# Altium PCB tablo tara2.PcbDoc
Units mm, origin at the board's own origin, x right, y up, seen from the top; angles counter-clockwise.
Board outline 151 x 86.38 mm, 2 copper layers (Top Layer, Bottom Layer); 22 components, 10 nets, 58 pads, 0 vias.
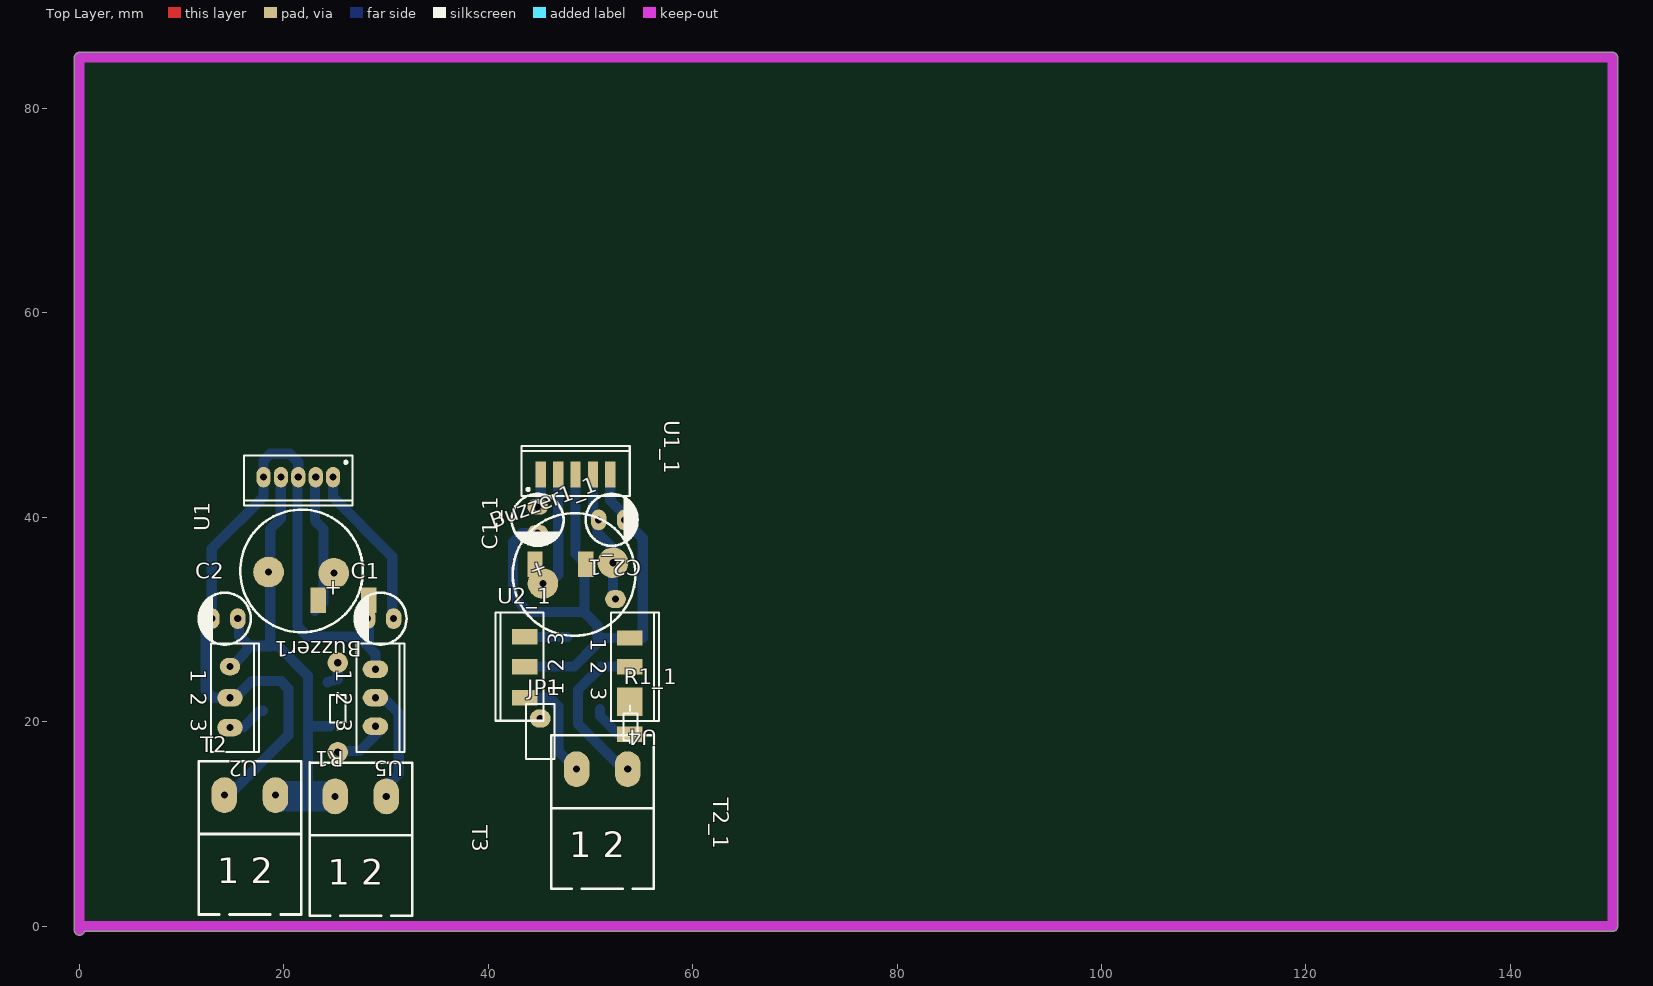
[diagram p0: Top Layer view]
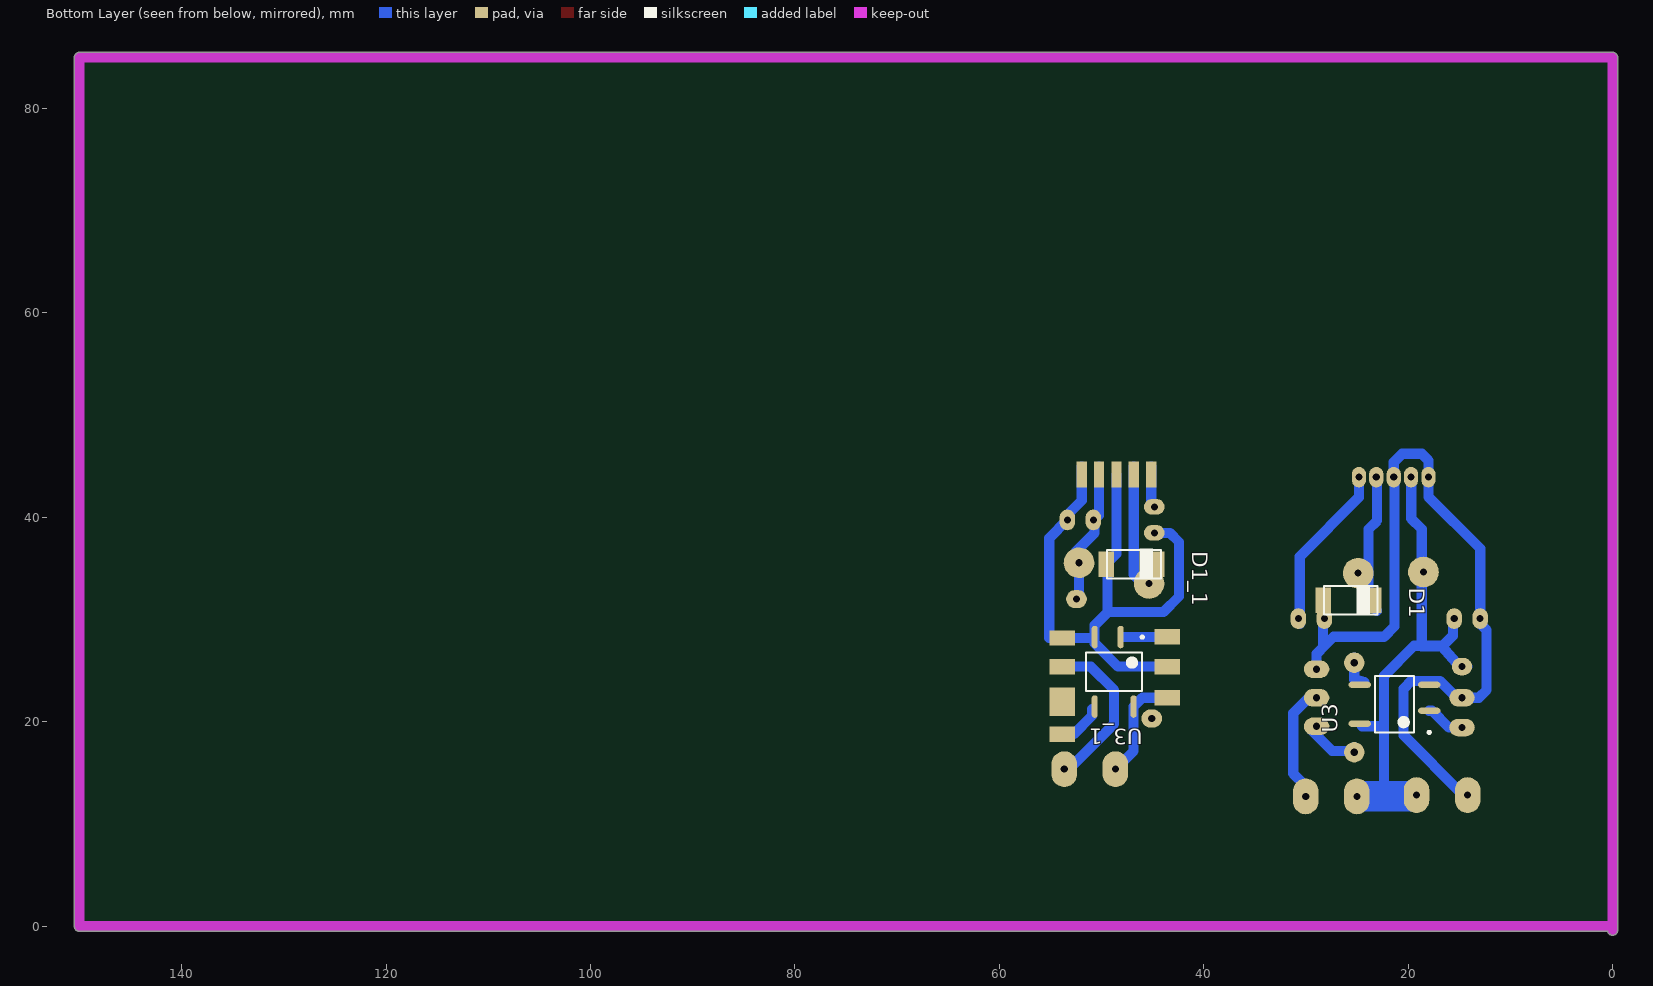
[diagram p1: Bottom Layer view, seen from below]

## Layer stack, top to bottom
Top Solder: solder mask 0.0102, Solder Resist, Dk 3.5
Top Layer: signal copper 0.0356
Dielectric 1: dielectric 0.32, FR-4, Dk 4.8
Bottom Layer: signal copper 0.0356
Bottom Solder: solder mask 0.0102, Solder Resist, Dk 3.5

## Board outline
-0.5,-0.381 -0.5,85 cw(c0,85) 0,85.5 150,85.5 cw(c150,85) 150.5,85 150.5,0 cw(c150,0) 150,-0.5 0.486,-0.5 cw(c0,-0.381)

## Design rules (kind name [scope] priority, off if disabled: settings)
Clearance Clearance_1 [InPolygon] p1: gap=0.8 ignorepadtopadclearanceinfootprint=FALSE
Clearance [All] p2: gap=0.254 ignorepadtopadclearanceinfootprint=FALSE except(0: Arc-Hole Track-Hole SMDPad-Hole THPad-Hole Via-Hole Fill-Hole Poly-Hole Region-Hole Text-Hole)
PolygonConnect [All] p1: connectstyle=Relief reliefconductorwidth=0.254 reliefentries=4 polygonreliefangle="90 Angle" airgapwidth=0.254
RoomDefinition "tablo tara2" [InComponentClass('tablo tara2')] p1: confinementstyle=ConfineIn formatcopy=TRUE lockcomponents=FALSE outline 144.907,-4.953 247.904,-4.953 247.904,23.114 144.907,23.114
RoutingLayers [All] p1: top layer_v5=FALSE bottom layer_v5=TRUE
RoutingVias [All] p1: holewidth=0.711 width=2.5 viastyle="Through Hole" minholewidth=0.711 minwidth=1.27 maxholewidth=0.711 maxwidth=2
SolderMaskExpansion [All] p1: expansion=0.102
Width [All] p1: maxlimit=3 minlimit=0.5 preferedwidth=1
29 further rules are at their usual default settings.

## Components (designator, comment, footprint, x,y, rotation, side; value= is the part's Value field where it differs from the comment)
Buzzer1 "Buzzer" BUZZER#1 21.732,34.758 r180 top
Buzzer1_1 "Buzzer" BUZZER#2 48.387,34.417 r20 top (schematic designator Buzzer1)
C1 "Value" ELEC-CAP-RAD10-20 29.464,30.099 r0 top
C1_1 "Value" ELEC-CAP-RAD10-20 44.831,39.751 r90 top (schematic designator C1)
C2 "Value" ELEC-CAP-RAD10-20 14.224,30.099 r0 top
C2_1 "Value" ELEC-CAP-RAD10-20 52.07,39.751 r180 top (schematic designator C2)
D1 "MODEL" DO-41 29.337,31.877 r180 bottom
D1_1 "MODEL" DO-41 50.546,35.433 r180 bottom (schematic designator D1)
JP1 "Jumper" "Header 2X1" 45.085,19.05 r90 top
R1 "Res2" Res50#1 25.273,20.066 r270 top
R1_1 "Res2" Res50#2 53.848,20.701 r90 top (schematic designator R1)
T2 "Phoenix terminal" "phoenix terminal 2" 11.684,1.143 r0 top
T2_1 "Phoenix terminal" "phoenix terminal 2" 46.148,3.683 r0 top (schematic designator T2)
T3 "Phoenix terminal" "phoenix terminal 2" 22.526,1.016 r0 top
U1 "LM2576T-3.3" T05A#1 21.414,43.942 r180 top
U1_1 "LM2576T-3.3" T05A#2 48.543,44.196 r0 top (schematic designator U1)
U2 "L4931CV30" TO-220A#1 14.732,22.352 r270 top
U2_1 "L4931CV30" TO-220A#2 43.561,25.4 r90 top (schematic designator U2)
U3 "ATtiny15L-1SC" 8S2_N 21.336,21.717 r0 bottom
U3_1 "ATtiny15L-1SC" 8S2_N 48.768,24.892 r270 bottom (schematic designator U3)
U4 "L4931CV30" TO-220A#3 53.848,25.4 r270 top
U5 "L4931CV30" TO-220A#4 28.956,22.352 r270 top

## Footprints (in the part's own frame and the unit in brackets; to place one, negate y for a bottom-side part, rotate by r counter-clockwise, add the part's x,y. Pads: shape width x height; smd on the part's side, far side on the other; paste and mask are expansions set on the pad)
8S2_N [mm] "SOP, 8-Leads, Body 5.3x5.3mm, Pitch 1.27mm, IPC Medium Density"
  oval 2.2x0.6 smd: 2(-3.4,0.635) 4(-3.4,-1.905) 5(3.4,-1.905) 8(3.4,1.905)
  silkscreen extent -3.52,-2.75 1.9,2.88, body extent -2.73,-2.75 2.73,2.75, height 2.16
BUZZER#1 [mm] "BUZZER"
  round 3 hole 0.7: 1(-3.16,0.214) 2(3.231,0.105)
  silkscreen extent -6,-6 6,6
BUZZER#2 [mm] "BUZZER"
  round 3 hole 0.7: 1(-3.16,0.214) 2(3.971,-0.229)
  silkscreen extent -6,-6 6,6
DO-41 [mm]
  rect 1.5x2.5 all layers, no hole: 1(1.016,0) 2(5.969,0)
  silkscreen extent 1.1,-1.5 6.35,1.5, body extent -0.41,-1.33 8,1.33, height 3.33
ELEC-CAP-RAD10-20 [mil]
  oval 60x80 hole 27.56: 1(-50,0) 2(50,0)
  silkscreen extent -100,-100 100,100, body extent -124,-124 124,124, height 404
"Header 2X1" [mil]
  oval 70x80 hole 27.56: 1(510,-290) 2(50,0)
  silkscreen extent -105,-55 105,55, body extent -100,-50 100,50, height 374
"phoenix terminal 2" [mm] "2 terminals"
  oval 2.5x3.5 hole 0.7: 1(2.493,11.684) 2(7.493,11.684)
  silkscreen extent 0,0 10.03,15
Res50#1 [mm] "50mm Pin Spacing"
  round 2 hole 0.7: 1(-5.715,0) 2(3.048,0)
  silkscreen extent -2.77,-0.76 0.89,0.76
Res50#2 [mm] "50mm Pin Spacing"
  rect 1.5x2.5 all layers, no hole: 1(-1.905,0) 2(0.635,0)
  silkscreen extent -2.77,-0.76 0.89,0.64
T05A#1 [mm] "TO, Thru-Hole, Vertical, Heatsink Mounted; 5 In-Line Leads; Pitch 1.70 mm"
  oval 1.4x2 hole 0.7: 1(-3.4,0) 2(-1.7,0) 3(0,0) 4(1.7,0) 5(3.4,0)
  silkscreen extent -5.3,-2.1 5.3,2.8, body extent -5.35,-2.15 5.35,2.85, height 19.6
T05A#2 [mm] "TO, Thru-Hole, Vertical, Heatsink Mounted; 5 In-Line Leads; Pitch 1.70 mm"
  rect 1x2.5 all layers, no hole: 1(-3.4,0) 2(-1.7,0) 3(0,0) 4(1.7,0) 5(3.4,0)
  silkscreen extent -5.3,-2.1 5.3,2.8, body extent -5.35,-2.15 5.35,2.85, height 19.6
TO-220A#1 [mm] "TO, Thru-Hole, Vertical, Heatsink Mounted; 3 In-Line Leads; Pitch 2.54 mm"
  oval 1.7x2 hole 0.7: 1(-3.048,0)
  oval 1.7x2.5 hole 0.7: 2(0,0) 3(2.921,0)
  silkscreen extent -5.3,-1.85 5.3,2.85
TO-220A#2 [mm] "TO, Thru-Hole, Vertical, Heatsink Mounted; 3 In-Line Leads; Pitch 2.54 mm"
  rect 1.5x2.5 all layers, no hole: 1(-3.048,0) 2(0,0) 3(2.921,0)
  silkscreen extent -5.3,-1.85 5.3,2.85
TO-220A#3 [mm] "TO, Thru-Hole, Vertical, Heatsink Mounted; 3 In-Line Leads; Pitch 2.54 mm"
  rect 1.5x2.5 all layers, no hole: 1(-2.794,0) 2(0,0) 3(2.794,0)
  silkscreen extent -5.3,-1.85 5.3,2.85
TO-220A#4 [mm] "TO, Thru-Hole, Vertical, Heatsink Mounted; 3 In-Line Leads; Pitch 2.54 mm"
  oval 1.7x2.5 hole 0.7: 1(-2.794,0) 2(0,0) 3(2.794,0)
  silkscreen extent -5.3,-1.85 5.3,2.85

## Part data
C1 C1_1 C2 C2_1: library part "Capacitor Electrolytic", "Electrolytic Capacitor"
D1 D1_1: library part Diode, "Diode", MODEL=1N4148
R1 R1_1: "Resistor", LatestRevisionDate=17-Jul-2002, LatestRevisionNote="Re-released for DXP Platform.", PackageDescription="Axial Device, Thru-Hole; 2 Leads; 0.4 in Pin Spacing", PackageReference=AXIAL-0.4, Published=8-Jun-2000, Publisher="Altium Limited"
T2 T2_1 T3: library part "Phoenix terminal 2", "Terminal 2 Pin", ComponentLinkURL=www.picpars.com, Designer="Seyed Mohsen Ghasemain", E-mail=picpars@gmail.com
U1 U1_1: "SIMPLE SWITCHER; 3A Step-Down Voltage Regulator", DigiKeyPartNumber=LM2576T-3.3NS-ND, Manufacturer="National Semiconductor", PackageTopMarking="NSUZXYTT*LM2576T*-3.3 P+", PowerWise=N, Code_JEDEC=TO-220-AB, ComponentLink1Description="LM2576 Datasheet", ComponentLink1URL=http://www.national.com/ds/LM/LM2576.pdf, ComponentLink2Description="LM2576 Web Page", ComponentLink2URL=http://www.national.com/pf/LM/LM2576.html, ComponentLink3Description="T05A Package Page", ComponentLink3URL=http://www.national.com/packaging/folders/t05a.html, CompType=Switcher, DatasheetVersion=Aug-2004, FirstPublished=4-Dec-2008, PackageDescription="TO-220, Molded, 5 Lead, Straight", PackageReference=T05A, PackageVersion="revJ, Jan-1992", PartNumber=LM2576T-3.3, PinCount=5, Publisher="Altium Limited", RoHS=Y
U2 U2_1 U4 U5: "250mA, Very Low Drop ( 0.4V) Voltage Regulator", ComponentLink1Description="Manufacturer Link", ComponentLink1URL=http://www.st.com/, ComponentLink2Description=Datasheet, ComponentLink2URL=http://www.st.com/stonline/products/literature/ds/4340/l4931abxx15.pdf, DatasheetVersion=Apr-1999, LatestRevisionDate=06-Jun-2005, LatestRevisionNote="PCB Pin sequence re-ordered.", PackageDescription="TO, Thru-Hole, Vertical, Heatsink Mounted; 3 In-Line Leads; Pitch 2.54 mm", PackageReference=TO-220A, PackageVersion=Jul-2004, Published=24-Aug-2001, Publisher="Altium Limited"
U3 U3_1: "8-Bit AVR Microcontroller with 1K Byte of Flash Memory", Supplier Part Number 1=ATTINY15L-1SC-ND, ComponentLink1Description=Datasheet, ComponentLink1URL=http://www.atmel.com/dyn/resources/prod_documents/doc1187.pdf, ComponentLink2Description="Atmel.com Home", ComponentLink2URL=http://www.atmel.com, DatasheetVersion=1187E-AVR-06/02, LatestRevisionDate=16-Oct-2006, LatestRevisionNote="IPC-7351 Footprint Added.", PackageDescription="8-Lead, 0.208\" Body, Plastic Small Outline Package (EIAJ)", PackageReference=8S2, PackageVersion="revF, Apr-2008", Published=17-Sep-2003, Publisher="Altium Limited", Supplier 1=Digi-Key, Supplier 2=Mouser, Supplier Part Number 2=556-ATTINY15L1SC
Buzzer1 Buzzer1_1: ComponentLinkURL=www.picpars.com, Designer="Seyed Mohsen Ghasemain"

## Nets (pads, with @x,y where several pads share a name; then routed paths per layer and width w, separated by ;. In a path a pad name is that pad's centre, name@x,y a point inside that pad or via, vN(x,y) a via of type N, cw(c..) or ccw(c..) an arc to the next point about the centre after c; other vN are vias at no path point)
bat: Buzzer1.2 C2.2 T2.2 T3.1 U1.4 U2.1 U3.8 | length 53.8
  Bottom Layer w1: U2.1@14.224,25.4 U2.1 14.986,25.4 16.686,27.354 ; C2.2@15.621,29.591 15.621,28.419 16.608,27.432 ; T2.2@18.669,12.319 T2.2 22.733,12.827 ; U1.4@19.685,43.942 19.685,39.878 18.669,38.862 18.669,27.432 ; 21.971,13.589 22.352,13.97 22.352,19.558 U3.8@24.482,19.558 ; 22.352,19.812 22.352,24.511 19.431,27.432 18.669,27.432 ; 16.608,27.432 16.686,27.354 ; 16.608,27.432 18.669,27.432 ; 16.686,27.354 18.669,27.354 18.669,27.432
  Bottom Layer w3: T2.2@19.812,12.7 T3.1@24.384,12.7
GND: C1.1 C2.1 D1.1 T2.1 U1.3 U1.5 U2.2 U3.4 U5.1 | length 82.3
  Bottom Layer w1: T2.1 14.605,12.827 20.447,18.669 20.447,23.241 19.685,24.003 16.891,24.003 15.24,22.352 U2.2 13.081,22.352 12.319,23.114 12.319,28.956 12.954,29.591 C2.1 12.954,36.957 18.014,42.017 U1.5 18.014,45.573 18.669,46.228 20.574,46.228 21.414,45.388 U1.3 ; U1.3@21.336,43.942 21.336,29.337 22.352,28.321 27.305,28.321 28.13,27.495 ; D1.1 28.321,27.686 28.13,27.495 ; U5.1 28.956,26.67 28.13,27.495
ir: U2.3 U3.2 | length 4.4
  Bottom Layer w1: U2.3@14.224,19.431 U2.3 16.002,19.431 17.653,21.082 U3.2
NetBuzzer1_1: Buzzer1.1 D1.2 U1.2 | length 13.8
  Bottom Layer w1: D1.2@23.036,30.861 23.876,31.701 23.876,38.847 23.036,39.688 U1.2@23.036,43.942
NetC1_2: C1.2 U1.1 | length 16.8
  Bottom Layer w1: U1.1 24.814,41.959 30.607,36.166 C1.2@30.607,29.591
NetE1_1: 
NetE3_1: 
NetR1_2: R1.2 U5.3 | length 5.1
  Bottom Layer w1: R1.2@25.273,17.526 25.654,17.145 27.432,17.145 U5.3@29.4,19.113
NetT3_2: T3.2 U5.2 | length 13
  Bottom Layer w1: U5.2@29.591,22.352 29.718,22.352 31.242,20.828 31.242,14.93 T3.2@30.127,13.815 ; T3.2@30.099,13.843 T3.2@30.127,13.815 ; T3.2@30.48,13.589 T3.2@30.48,13.462 ; T3.2@30.127,13.815 T3.2@30.48,13.462 ; T3.2@30.48,13.462 29.718,12.7 T3.2 30.48,12.7 T3.2@30.48,13.462
out: R1.1 U3.5 | length 3.2
  Bottom Layer w1: U3.5@24.257,23.876 24.636,23.982 25.273,24.159 R1.1 R1.1@25.273,26.289
pads on no net: Buzzer1_1.1 Buzzer1_1.2 C1_1.1 C1_1.2 C2_1.1 C2_1.2 D1_1.1 D1_1.2 JP1.1 JP1.2 R1_1.1 R1_1.2 T2_1.1 T2_1.2 U1_1.1 U1_1.2 U1_1.3 U1_1.4 U1_1.5 U2_1.1 U2_1.2 U2_1.3 U3_1.2 U3_1.4 U3_1.5 U3_1.8 U4.1 U4.2 U4.3
copper on no net: | length 130.8
  Bottom Layer w1: 43.561,22.352 46.003,22.352 46.863,21.492 46.863,17.145 48.641,15.367 ; 43.561,25.4 48.387,25.4 50.673,27.686 50.673,28.292 ; 43.688,28.575 43.971,28.292 47.752,28.292 ; 44.386,34.861 45.725,33.523 45.725,33.283 46.843,34.401 46.843,44.196 46.843,44.958 ; 44.831,38.481 43.307,38.481 42.418,37.592 42.418,32.258 43.942,30.734 49.403,30.734 ; 44.831,41.021 45.143,41.333 45.143,44.196 45.143,44.958 ; 48.543,44.196 48.543,36.42 49.53,35.433 ; 49.403,34.798 49.403,30.734 ; 50.243,44.958 50.243,44.196 50.243,40.181 50.673,39.751 50.673,38.481 52.578,36.576 52.578,35.306 ; 50.927,21.238 50.927,20.574 52.705,18.796 53.848,18.796 ; 51.943,44.958 51.943,44.196 51.943,41.656 53.213,40.386 53.213,39.751 ; 52.197,35.56 52.197,32.258 52.451,32.004 ; 53.34,39.751 55.118,37.973 55.118,28.194 53.848,28.194 50.771,28.194 50.673,28.292 ; 53.641,15.367 53.213,15.367 48.768,19.812 48.768,23.114 51.054,25.4 53.848,25.4 ; 49.403,30.734 50.673,29.464 50.673,28.292

## Keep-outs
Keep-Out Layer:
  lines w1: 0,-0.381 0,85 150,85 150,0 0,0

## Text inside footprints (layer, text, board x,y; h text height)
Buzzer1: Top Overlay "+" at 25.732,33.758 h1.52 r180
Buzzer1_1: Top Overlay "+" at 44.286,33.989 h1.52 r20
T2: Top Overlay "1 2" at 13.462,4.191 h2.5
T2_1: Top Overlay "1 2" at 47.926,6.731 h2.5
T3: Top Overlay "1 2" at 24.304,4.064 h2.5
U2: Top Overlay "1" at 10.907,25.142 h1.5 r270; Top Overlay "2" at 10.907,22.852 h1.5 r270; Top Overlay "3" at 10.907,20.312 h1.5 r270
U2_1: Top Overlay "1" at 47.386,22.61 h1.5 r90; Top Overlay "2" at 47.386,24.9 h1.5 r90; Top Overlay "3" at 47.386,27.44 h1.5 r90
U4: Top Overlay "1" at 50.023,28.19 h1.5 r270; Top Overlay "2" at 50.023,25.9 h1.5 r270; Top Overlay "3" at 50.023,23.36 h1.5 r270
U5: Top Overlay "1" at 25.131,25.142 h1.5 r270; Top Overlay "2" at 25.131,22.852 h1.5 r270; Top Overlay "3" at 25.131,20.312 h1.5 r270